# EAGLE board Western Aero 2020 (EAGLE 9.4.2)
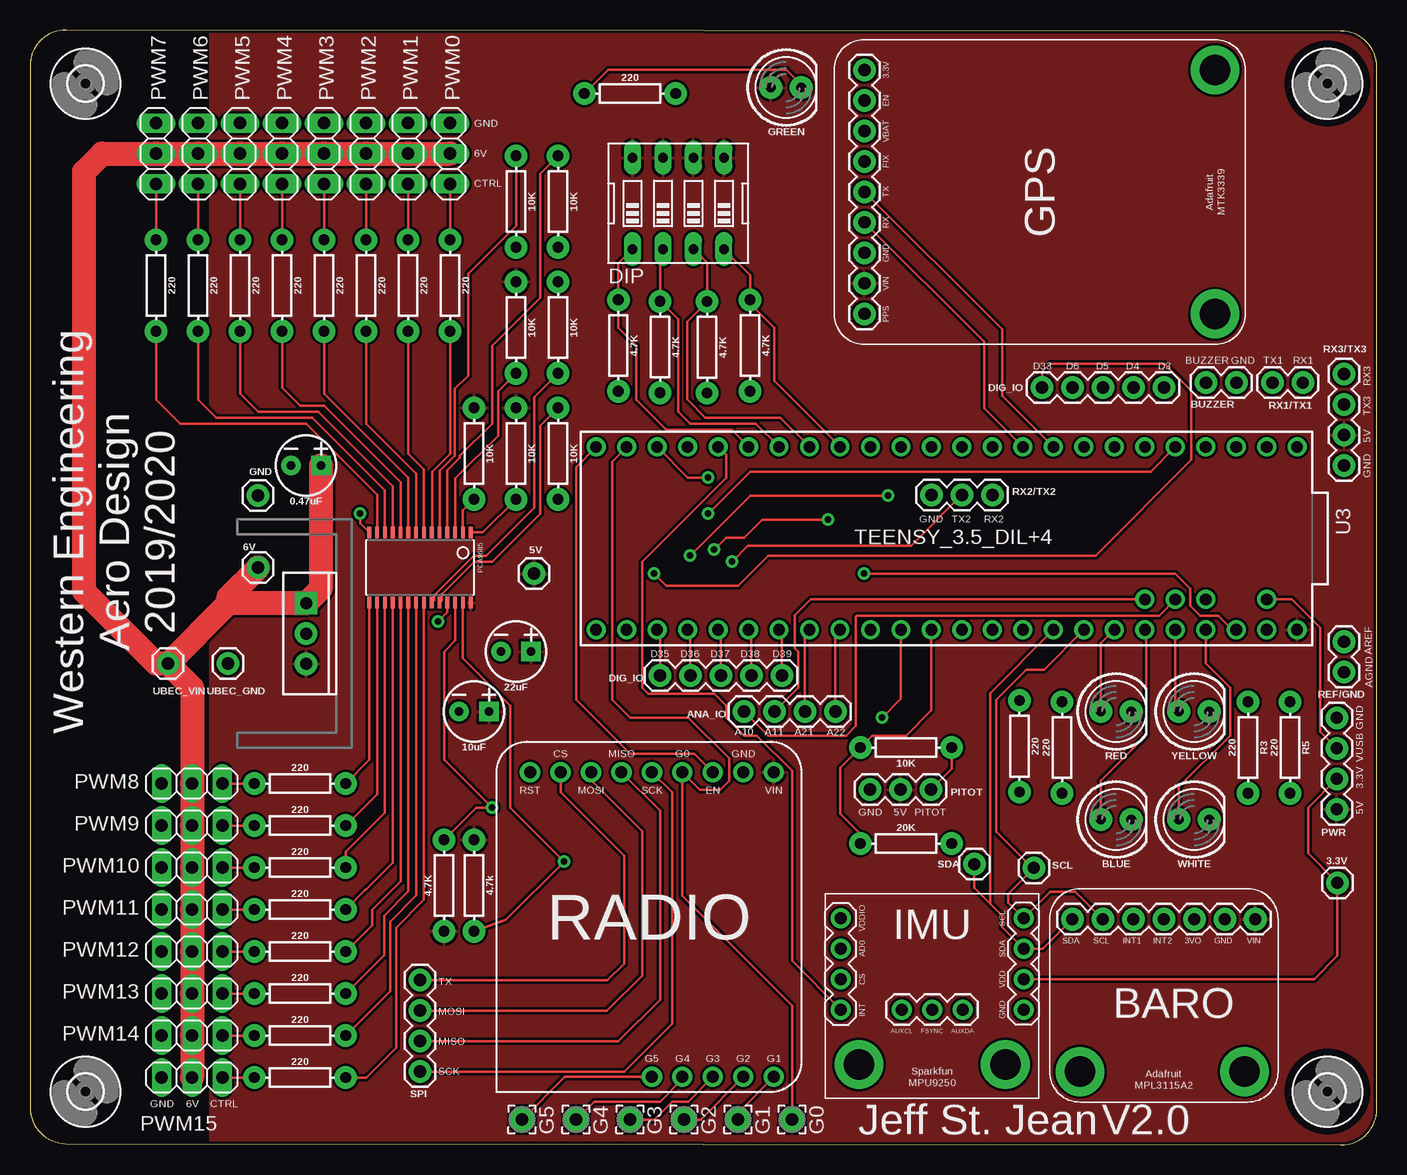
[diagram p0: board, top side]
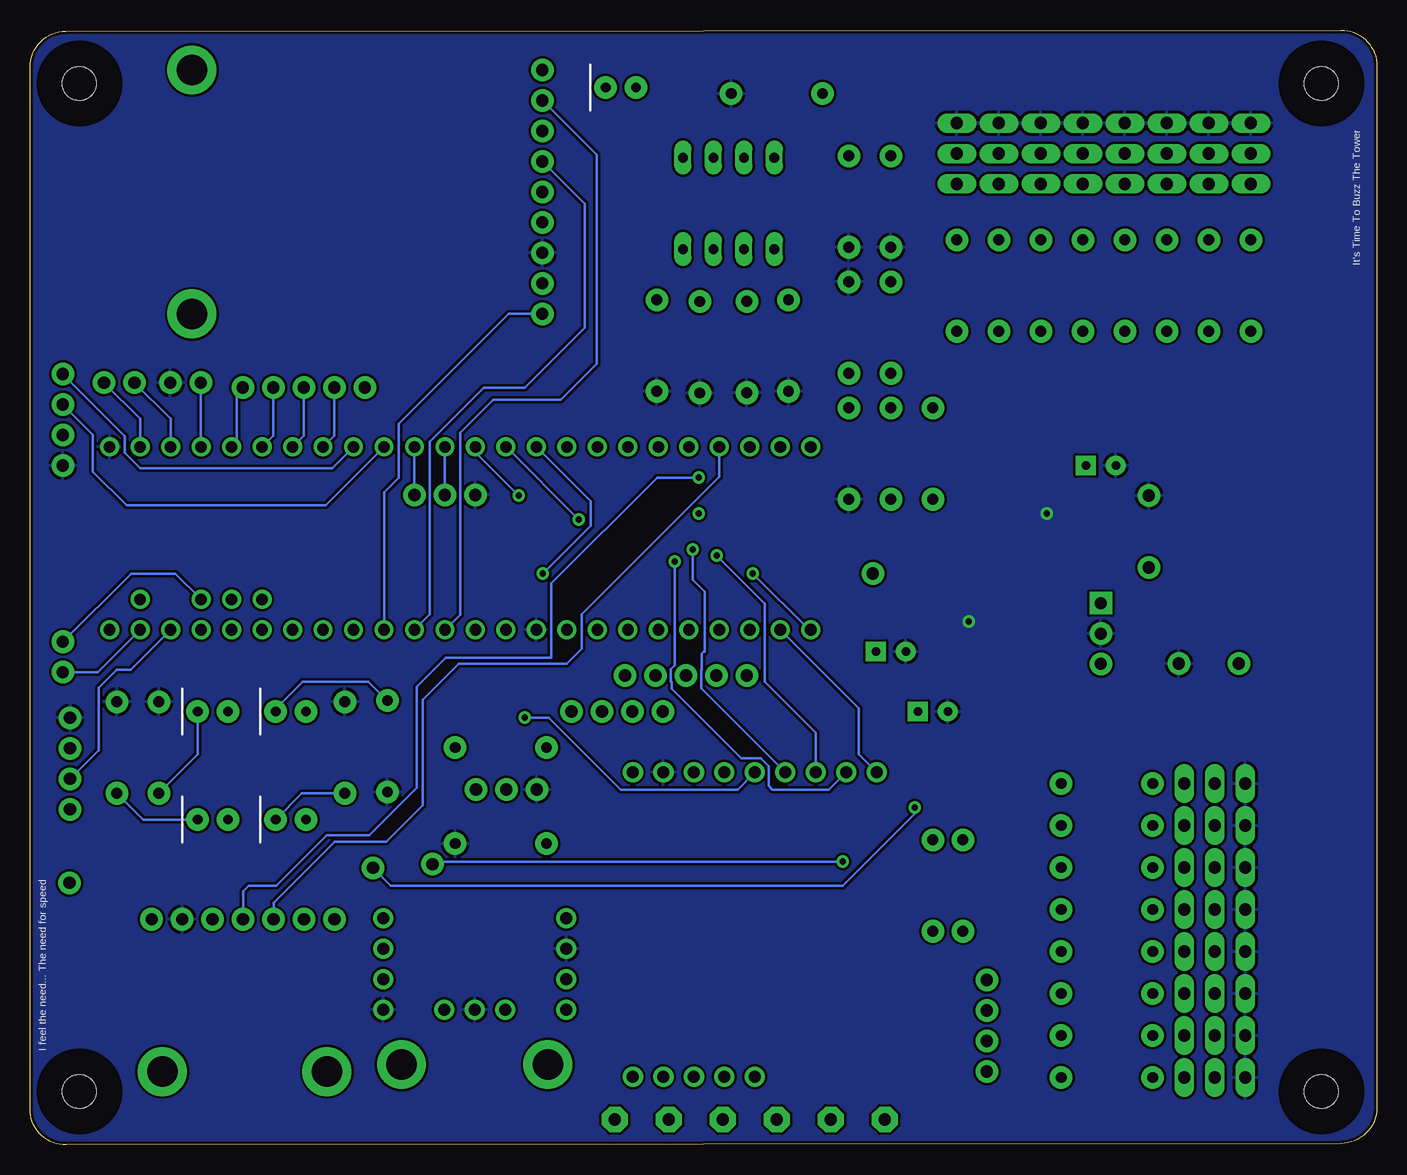
[diagram p1: board, bottom side, seen from below]

Size 112.24 x 92.91 mm. Coordinates in mm from the lower left corner, seen from the top.
Outline: 0,89.91 0,3.12 arc90 3,0.12 109.24,0 arc90 112.24,3 112.24,89.82 arc90 109.24,92.82 3,92.91 arc90 0,89.91
Copper layers (1*16): Top 0.035mm / dielectric 1.5mm / Bottom 0.035mm
Design rules "SparkFun": minimum track width 8mil, minimum drill 20mil, track to track 8mil, track to pad 8mil, pad to pad 8mil, via to via 8mil, smd to smd 8mil, copper to edge 10mil, drill to drill 8mil, minimum pad ring 12mil, minimum via ring 10mil, stop-mask expansion 4mil, vias tented up to drill 25mil, thermal gap 10mil

## Footprints (pad centres in the part's own frame; a part is rotated, then mirrored left to right if it is on the bottom)
1X01 = drill 1.016 pad 1.88: 1 0,0
CPOL-RADIAL-2.5MM-5MM = drill 0.7 pad 1.651 square: 1 1.25,0 | drill 0.7 pad 1.651: 2 -1.25,0
LED_5MM = drill 0.813 pad 1.88: A -1.27,0; K 1.27,0
EDG-04 = drill 0.813 long: 1 -3.81,-3.81; 2 -1.27,-3.81; 3 1.27,-3.81; 4 3.81,-3.81; 5 3.81,3.81; 6 1.27,3.81; 7 -1.27,3.81; 8 -3.81,3.81
2,15/1,0 = drill 1.016 pad 2.159 octagon: 1 0,0
2,8 = hole 2.8: 0,0
1X03 = drill 1.016 pad 1.88: 1 0,0; 2 2.54,0; 3 5.08,0
1X02 = drill 1.016 pad 1.88: 1 0,0; 2 2.54,0
1X04 = drill 1.016 pad 1.88: 1 0,0; 2 2.54,0; 3 5.08,0; 4 7.62,0
1X05 = drill 1.016 pad 1.88: 1 0,0; 2 2.54,0; 3 5.08,0; 4 7.62,0; 5 10.16,0
1X03' = drill 1.016 long: 1 -2.54,0; 2 0,0; 3 2.54,0
TSSOP28 = smd 0.305 x 0.991: 1 -4.225,-2.918; 2 -3.575,-2.918; 3 -2.925,-2.918; 4 -2.275,-2.918; 5 -1.625,-2.918; 6 -0.975,-2.918; 7 -0.325,-2.918; 8 0.325,-2.918; 9 0.975,-2.918; 10 1.625,-2.918; 11 2.275,-2.918; 12 2.925,-2.918; 13 3.575,-2.918; 14 4.225,-2.918; 15 4.225,2.918; 16 3.575,2.918; 17 2.925,2.918; 18 2.275,2.918; 19 1.625,2.918; 20 0.975,2.918; 21 0.325,2.918; 22 -0.325,2.918; 23 -0.975,2.918; 24 -1.625,2.918; 25 -2.275,2.918; 26 -2.925,2.918; 27 -3.575,2.918; 28 -4.225,2.918
AXIAL-0.3 = drill 0.9 pad 1.88: P$1 -3.81,0; P$2 3.81,0
TO220-IGO = drill 1 pad 1.88: GND 0,0; OUT 2.54,0 | drill 1 pad 1.88 square: IN -2.54,0
TEENSY_3.5_DIL+4 = drill 0.965: 0 -7.62,26.67; 1 -7.62,24.13; 2 -7.62,21.59; 3 -7.62,19.05; 3.3V 7.62,24.13; 3.3V3 -7.62,-6.35; 4 -7.62,16.51; 5 -7.62,13.97; 6 -7.62,11.43; 7 -7.62,8.89; 8 -7.62,6.35; 9 -7.62,3.81; 10 -7.62,1.27; 11 -7.62,-1.27; 12 -7.62,-3.81; 13 7.62,-3.81; 14/A0 7.62,-1.27; 15/A1 7.62,1.27; 16/A2 7.62,3.81; 17/A3 7.62,6.35; 18/A4 7.62,8.89; 19/A5 7.62,11.43; 20/A6 7.62,13.97; 21/A7 7.62,16.51; 22/A8 7.62,19.05; 23/A9 7.62,21.59; 24 -7.62,-8.89; 25 -7.62,-11.43; 26 -7.62,-13.97; 27 -7.62,-16.51; 28 -7.62,-19.05; 29 -7.62,-21.59; 30 -7.62,-24.13; 31/A12 -7.62,-26.67; 32/A13 -7.62,-29.21; 33/A14 7.62,-29.21; 34/A15 7.62,-26.67; 35/A16 7.62,-24.13; 36/A17 7.62,-21.59; 37/A18 7.62,-19.05; 38/A19 7.62,-16.51; 39/A20 7.62,-13.97; A10 5.08,19.05; A11 5.08,16.51; A21 7.62,-11.43; A22 7.62,-8.89; AGND 7.62,26.67; AREF 5.08,21.59; GND -7.62,29.21; GND1 7.62,-6.35; VIN 7.62,29.21; VUSB 5.08,26.67
SPARKFUN_MPU9250_IMU = drill 1.001 pad 1.676: AD0 4.572,1.27; AUXCL 9.652,6.35; AUXDA 9.652,11.43; CS 7.112,1.27; FSYNC 9.652,8.89; GND 9.652,16.51; SCL 2.032,16.51; SDA 4.572,16.51; VDD 7.112,16.51; VDDIO 2.032,1.27 | drill 1 pad 1.676: INT 9.652,1.27 | drill 2.54 pad 4.064: P$1 14.224,2.794; P$2 14.224,14.986
ADAFRUIT_MPL3115A2_BAROMETER = drill 1.016 pad 1.88: 3VO 6.985,2.54; GND 4.445,2.54; INT1 12.065,2.54; INT2 9.525,2.54; SCL 14.605,2.54; SDA 17.145,2.54; VIN 1.905,2.54 | drill 2.54 pad 4.064: P$1 16.51,15.24; P$2 2.794,15.24
ADAFRUIT_RFM95W_LORA_RADIO = drill 1 pad 1.676: 1 2.29,-26.67; 2 4.83,-26.67; 3 7.37,-26.67; 4 9.91,-26.67; 5 12.45,-26.67; 6 14.99,-26.67; 7 17.53,-26.67; 8 20.07,-26.67; 9 22.61,-26.67; 10 2.29,-1.27; 11 4.83,-1.27; 12 7.37,-1.27; 13 9.91,-1.27; 14 12.45,-1.27
ADAFRUIT_MTK3339_GPS = drill 1.016 pad 1.88: 3.3V 2.54,2.54; EN 5.08,2.54; FIX 10.16,2.54; GND 17.78,2.54; PPS 22.86,2.54; RX 15.24,2.54; TX 12.7,2.54; VBAT 7.62,2.54; VIN 20.32,2.54 | drill 2.54 pad 4.064: P$1 22.86,31.75; P$2 2.54,31.75

## Placement (x,y rotation side)
3.3V  [1X01]  108.95,21.85 0 top
5V  [1X01]  42,47.62 0 top
6V  [1X01]  19,48.12 0 top
C1  0.47uF  [CPOL-RADIAL-2.5MM-5MM]  23,56.62 0 top
C2  22uF  [CPOL-RADIAL-2.5MM-5MM]  40.5,41.12 0 top
C4  10uF  [CPOL-RADIAL-2.5MM-5MM]  37,36.12 0 top
D1  BLUE  [LED_5MM]  90.5,27.12 0 top
D2  YELLOW  [LED_5MM]  97,36.12 0 top
D3  WHITE  [LED_5MM]  97,27.12 0 top
D4  GREEN  [LED_5MM]  63,88.12 0 top
D6  RED  [LED_5MM]  90.5,36.12 0 top
DIP  [EDG-04]  54.02,78.46 0 top
G0  WIREPAD  [2,15/1,0]  63.5,2.12 270 top
G1  WIREPAD  [2,15/1,0]  59,2.12 270 top
G2  WIREPAD  [2,15/1,0]  54.5,2.12 270 top
G3  WIREPAD  [2,15/1,0]  50,2.12 270 top
G4  WIREPAD  [2,15/1,0]  45.5,2.12 270 top
G5  WIREPAD  [2,15/1,0]  41,2.12 270 top
GND  [1X01]  19,54.12 0 top
H1  MOUNT-HOLE2.8  [2,8]  4.63,88.45 0 top
H2  MOUNT-HOLE2.8  [2,8]  108.13,88.45 0 top
H3  MOUNT-HOLE2.8  [2,8]  108.13,4.45 0 top
H4  MOUNT-HOLE2.8  [2,8]  4.63,4.45 0 top
J1  PITOT  [1X03]  70,29.62 0 top
J2  BUZZER  [1X02]  98,63.52 0 top
J3  RX2/TX2  [1X03]  75.12,54.17 0 top
J4  RX3/TX3  [1X04]  109.5,56.62 90 top
J5  SPI  [1X04]  32.5,6.12 90 top
J6  DIG_IO  [1X05]  52.5,39.12 0 top
J7  RX1/TX1  [1X02]  106.08,63.52 180 top
J8  DIG_IO  [1X05]  94.5,63.12 180 top
J9  REF/GND  [1X02]  109.5,39.4 90 top
J10  ANA_IO  [1X04]  59.5,36.12 0 top
J11  PWR  [1X04]  108.9,27.97 90 top
JP1  PWM0  [1X03']  35,82.62 90 top
JP2  PWM1  [1X03']  31.5,82.62 90 top
JP3  PWM2  [1X03']  28,82.62 90 top
JP4  PWM3  [1X03']  24.5,82.62 90 top
JP5  PWM4  [1X03']  21,82.62 90 top
JP6  PWM5  [1X03']  17.5,82.62 90 top
JP7  PWM6  [1X03']  14,82.62 90 top
JP8  PWM7  [1X03']  10.5,82.62 90 top
JP9  PWM8  [1X03']  13.5,30.12 180 top
JP10  PWM9  [1X03']  13.5,26.62 180 top
JP11  PWM10  [1X03']  13.5,23.12 180 top
JP12  PWM11  [1X03']  13.5,19.62 180 top
JP13  PWM12  [1X03']  13.5,16.12 180 top
JP14  PWM13  [1X03']  13.5,12.62 180 top
JP15  PWM14  [1X03']  13.5,9.12 180 top
JP16  PWM15  [1X03']  13.5,5.62 180 top
PCA9685  [TSSOP28]  32.5,48.12 180 top
R1  220  [AXIAL-0.3]  82.45,33.22 90 top
R2  220  [AXIAL-0.3]  86,33.12 270 top
R3  220  [AXIAL-0.3]  101.5,33.12 270 top
R4  220  [AXIAL-0.3]  50,87.62 180 top
R5  220  [AXIAL-0.3]  105,33.12 270 top
R6  4.7K  [AXIAL-0.3]  60,66.62 90 top
R7  4.7K  [AXIAL-0.3]  56.42,66.47 90 top
R8  4.7K  [AXIAL-0.3]  52.5,66.5 90 top
R9  4.7K  [AXIAL-0.3]  49.02,66.62 90 top
R10  220  [AXIAL-0.3]  35,71.62 90 top
R11  220  [AXIAL-0.3]  31.5,71.62 90 top
R12  220  [AXIAL-0.3]  28,71.62 90 top
R13  220  [AXIAL-0.3]  24.5,71.62 90 top
R14  220  [AXIAL-0.3]  21,71.62 90 top
R15  220  [AXIAL-0.3]  17.5,71.62 90 top
R16  220  [AXIAL-0.3]  14,71.62 90 top
R17  220  [AXIAL-0.3]  10.5,71.62 90 top
R18  220  [AXIAL-0.3]  22.5,30.12 180 top
R19  220  [AXIAL-0.3]  22.5,26.62 180 top
R20  220  [AXIAL-0.3]  22.5,23.12 180 top
R21  220  [AXIAL-0.3]  22.5,19.62 180 top
R22  220  [AXIAL-0.3]  22.5,16.12 180 top
R23  220  [AXIAL-0.3]  22.5,12.62 180 top
R24  220  [AXIAL-0.3]  22.5,9.12 180 top
R25  220  [AXIAL-0.3]  22.5,5.62 180 top
R26  20K  [AXIAL-0.3]  73,25.12 180 top
R27  10K  [AXIAL-0.3]  73,33.12 0 top
R28  10K  [AXIAL-0.3]  40.5,57.62 90 top
R29  10K  [AXIAL-0.3]  37,57.62 90 top
R30  4.7k  [AXIAL-0.3]  37,21.62 90 top
R31  4.7K  [AXIAL-0.3]  34.5,21.62 270 top
R32  10K  [AXIAL-0.3]  40.5,68.12 90 top
R33  10K  [AXIAL-0.3]  44,57.62 90 top
R34  10K  [AXIAL-0.3]  40.5,78.62 90 top
R35  10K  [AXIAL-0.3]  44,78.62 90 top
R36  10K  [AXIAL-0.3]  44,68.12 90 top
SCL  [1X01]  83.65,23.1 0 top
SDA  [1X01]  78.7,23.4 0 top
U1  [TO220-IGO]  23,42.62 270 top
U3  TEENSY_3.5_DIL+4  [TEENSY_3.5_DIL+4]  76.39,50.55 270 top
U5  SPARKFUN_MPU9250_IMU  [SPARKFUN_MPU9250_IMU]  66.29,20.93 270 top
U6  ADAFRUIT_MPL3115A2_BAROMETER  [ADAFRUIT_MPL3115A2_BAROMETER]  104.01,21.35 180 top
U8  ADAFRUIT_RFM95W_LORA_RADIO  [ADAFRUIT_RFM95W_LORA_RADIO]  64.28,4.4 180 top
U9  ADAFRUIT_MTK3339_GPS  [ADAFRUIT_MTK3339_GPS]  67,92.12 270 top
UBEC_GND  [1X01]  16.5,40.12 0 top
UBEC_VIN  [1X01]  11.5,40.12 0 top

## Library data of the parts
3.3V 5V 6V GND J1-J3 J6-J9 SCL SDA UBEC_GND UBEC_VIN = SparkFun-Connectors
C1 C2 C4 = SparkFun-Capacitors; PROD_ID: CAP-08440
D1-D4 D6 = SparkFun-LED
DIP = special
G0 G1-G5 = wirepad
H1-H4 = holes
J4 J5 J10 J11 = SparkFun-Connectors; PROD_ID: CONN-09696
JP1-JP16 = pinhead
PCA9685 = adafruit
R1-R36 = SparkFun-Resistors; PROD_ID: RES-8371
U1 = SparkFun-IC-Power
U3 = Teensy_3_and_LC_Series_Boards_v1.4
U5 U6 U8 U9 = AERO_Eagle_Library

## Nets
3.3V: 3.3V.1 J11.2 U3.3.3V U3.3.3V3 U5.VDD
5V: 5V.1 C2.1 C4.1 D4.A DIP.5 DIP.6 DIP.7 DIP.8 J1.2 J4.2 J11.1 PCA9685.28 R28.P$2 R29.P$2 R30.P$2 R31.P$2 R32.P$2 U1.OUT U3.VIN U6.VIN U8.1 U9.VIN
6V: 6V.1 C1.1 JP1.2 JP2.2 JP3.2 JP4.2 JP5.2 JP6.2 JP7.2 JP8.2 JP9.2 JP10.2 JP11.2 JP12.2 JP13.2 JP14.2 JP15.2 JP16.2 U1.IN UBEC_VIN.1
A10: J10.1 U3.A10
A11: J10.2 U3.A11
A21: J10.3 U3.A21
A22: J10.4 U3.A22
AGND: J9.1 U3.AGND
AREF: J9.2 U3.AREF
BLUE_LED: D1.A U3.21/A7
BUZZER: J2.1 U3.2
D3: J8.1 U3.3
D4: J8.2 U3.4
D5: J8.3 U3.5
D6: J8.4 U3.6
D33: J8.5 U3.33/A14
D35: J6.1 U3.35/A16
D36: J6.2 U3.36/A17
D37: J6.3 U3.37/A18
D38: J6.4 U3.38/A19
D39: J6.5 U3.39/A20
DIP1: DIP.4 R6.P$2 U3.24
DIP2: DIP.3 R7.P$2 U3.25
DIP3: DIP.2 R8.P$2 U3.26
DIP4: DIP.1 R9.P$2 U3.27
ENV_INT1: U3.29 U6.INT1
ENV_INT2: U3.30 U6.INT2
GND: C1.2 C2.2 C4.2 GND.1 J1.1 J2.2 J3.1 J4.1 J11.4 JP1.3 JP2.3 JP3.3 JP4.3 JP5.3 JP6.3 JP7.3 JP8.3 JP9.3 JP10.3 JP11.3 JP12.3 JP13.3 JP14.3 JP15.3 JP16.3 PCA9685.14 PCA9685.25 R1.P$1 R2.P$1 R3.P$1 R4.P$1 R5.P$1 R6.P$1 R7.P$1 R8.P$1 R9.P$1 R26.P$1 R33.P$1 R34.P$1 R35.P$1 R36.P$2 U1.GND U3.GND U3.GND1 U5.AD0 U5.FSYNC U5.GND U6.GND U8.2 U9.GND UBEC_GND.1
GPS_EN: U3.15/A1 U9.EN
GPS_FIX: U3.16/A2 U9.FIX
GPS_PPS: U3.17/A3 U9.PPS
IMU_INT: U3.28 U5.INT
LORA_EN: U3.32/A13 U8.3
LORA_INT: G0.1 U3.31/A12 U8.4
LORA_RST: U3.34/A15 U8.9
MISO: J5.2 U3.12 U8.6
MOSI: J5.3 U3.11 U8.7
N$1: JP1.1 R10.P$2
N$2: D6.K R1.P$2
N$3: D1.K R2.P$2
N$4: D2.K R3.P$2
N$5: D3.K R5.P$2
N$6: D4.K R4.P$2
N$7: G5.1 U8.14
N$8: G1.1 U8.10
N$9: JP2.1 R11.P$2
N$10: G2.1 U8.11
N$11: JP3.1 R12.P$2
N$12: JP4.1 R13.P$2
N$13: JP5.1 R14.P$2
N$14: JP6.1 R15.P$2
N$15: JP7.1 R16.P$2
N$16: JP8.1 R17.P$2
N$17: JP9.1 R18.P$2
N$18: JP10.1 R19.P$2
N$19: JP11.1 R20.P$2
N$20: JP12.1 R21.P$2
N$21: JP13.1 R22.P$2
N$22: JP14.1 R23.P$2
N$23: JP15.1 R24.P$2
N$24: JP16.1 R25.P$2
N$25: G4.1 U8.13
N$26: G3.1 U8.12
N$27: PCA9685.1 R28.P$1
N$28: J1.3 R27.P$2
N$29: PCA9685.24 R33.P$2
N$30: PCA9685.23 R36.P$1
N$31: PCA9685.5 R34.P$2
N$32: PCA9685.4 R35.P$2
N$33: PCA9685.3 R32.P$1
N$34: PCA9685.2 R29.P$1
PITOT: R26.P$2 R27.P$1 U3.14/A0
PWM0: PCA9685.6 R10.P$1
PWM1: PCA9685.7 R11.P$1
PWM2: PCA9685.8 R12.P$1
PWM3: PCA9685.9 R13.P$1
PWM4: PCA9685.10 R14.P$1
PWM5: PCA9685.11 R15.P$1
PWM6: PCA9685.12 R16.P$1
PWM7: PCA9685.13 R17.P$1
PWM8: PCA9685.15 R18.P$1
PWM9: PCA9685.16 R19.P$1
PWM10: PCA9685.17 R20.P$1
PWM11: PCA9685.18 R21.P$1
PWM12: PCA9685.19 R22.P$1
PWM13: PCA9685.20 R23.P$1
PWM14: PCA9685.21 R24.P$1
PWM15: PCA9685.22 R25.P$1
RED_LED: D6.A U3.20/A6
RX1: J7.1 U3.0
RX2: J3.3 U3.9
RX3: J4.4 U3.7 U9.TX
SCK: J5.1 U3.13 U8.5
SCL: PCA9685.26 R31.P$1 SCL.1 U3.19/A5 U5.SCL U6.SCL
SDA: PCA9685.27 R30.P$1 SDA.1 U3.18/A4 U5.SDA U6.SDA
TX1: J7.2 U3.1
TX2: J3.2 J5.4 U3.10 U8.8
TX3: J4.3 U3.8 U9.RX
VUSB: J11.3 U3.VUSB
WHITE_LED: D3.A U3.23/A9
YELLOW_LED: D2.A U3.22/A8

## Tracks (layer width: path | path; a pad name or v marks a point on that pad's centre or on a via)
3.3V  (via drill 0.51)
  Top 0.203: U5.VDD 107,13.82 108.95,15.77 3.3V.1 106.5,24.3 106.5,28.11 J11.2 | U3.3.3V 100.19,42.93 99,44.12 97.5,44.12 96.7,44.92 96.7,46.37 95.45,47.62 v69.5,47.62
  Bottom 0.203: U3.3.3V3 65.5,53.63 65.5,51.62 v69.5,47.62 | U3.3.3V 103.83,39.62 105,39.62 106.5,38.12 106.5,32.91 J11.2
5V
  pour Top: 15,-0.38 15,93.12 112.5,93.12 112.5,-0.38
6V
  Top 2: JP1.2 JP2.2 JP3.2 JP4.2 JP5.2 JP6.2 JP7.2 JP8.2 6,82.62 4.5,81.12 4.5,46.12 10.5,40.12 UBEC_VIN.1 | UBEC_VIN.1 16.54,45.16 | 16.54,45.16 U1.IN 24.25,46.41 C1.1 | 16.54,45.16 16.54,45.66 6V.1 | UBEC_VIN.1 13.5,38.12 JP9.2 JP10.2 JP11.2 JP12.2 JP13.2 JP14.2 JP15.2 JP16.2
A10
  Top 0.203: U3.A10 94.09,44.12 68.9,44.12 68.8,44.02 68.8,34.92 68,34.12 61.5,34.12 J10.1
A11
  Top 0.203: J10.2 64,38.08 64,41.12 63.72,41.4 63.72,44.15 65.05,45.47 U3.A11
A21
  Top 0.203: J10.3 64.58,42.55 U3.A21
A22
  Top 0.203: J10.4 67.12,42.55 U3.A22
AGND
  Bottom 0.203: U3.AGND 106.59,39.4 J9.1
AREF
  Bottom 0.203: J9.2 103.81,47.62 100.13,47.62 U3.AREF
BLUE_LED
  Top 0.203: D1.A 89.23,30.35 93.02,34.14 93.02,42.82 U3.21/A7
BUZZER
  Bottom 0.203: J2.1 98,58.19 U3.2
D3  (via drill 0.51)
  Top 0.203: v56.5,52.62 60,56.12 93.39,56.12 U3.3
  Bottom 0.203: U3.3 95,58.61 95,62.62 J8.1
D4
  Bottom 0.203: U3.4 91.96,59.11 J8.2
D5
  Bottom 0.203: U3.5 89.42,59.11 J8.3
D6
  Bottom 0.203: U3.6 86.88,59.11 J8.4
D33  (via drill 0.51)
  Top 0.203: J8.5 84.34,64.46 85,65.12 94.5,65.12 96.78,62.85 96.78,57.1 88.8,49.12 61.5,49.12 59,46.62 53,46.62 v52,47.62
  Bottom 0.203: v52,47.62 47.31,42.93 U3.33/A14
D35
  Top 0.203: J6.1 52.5,42.69 U3.35/A16
D36
  Top 0.203: J6.2 55.04,42.69 U3.36/A17
D37
  Top 0.203: J6.3 57.58,42.69 U3.37/A18
D38
  Top 0.203: J6.4 60.12,42.69 U3.38/A19
D39
  Top 0.203: J6.5 62.66,42.69 U3.39/A20
DIP1
  Top 0.203: DIP.4 60,72.48 R6.P$2 60,70.12 62,68.12 62,63.67 U3.24
DIP2
  Top 0.203: DIP.3 56.42,73.52 R7.P$2 54.75,68.61 54.75,62.15 56.27,60.62 62.51,60.62 U3.25
DIP3
  Top 0.203: DIP.2 52.5,74.4 R8.P$2 54,68.81 54,61.12 55,60.12 60.47,60.12 U3.26
DIP4
  Top 0.203: DIP.1 49.02,73.47 R9.P$2 49.02,68.1 50.5,66.62 50.5,62.12 53.03,59.59 58.47,59.59 U3.27
ENV_INT1
  Bottom 0.203: U3.29 54.8,55.67 66.25,44.22 66.25,41.37 67.5,40.12 76.5,40.12 79.5,37.12 79.5,28.32 82.55,25.27 86.85,25.27 91.94,20.18 U6.INT1
ENV_INT2  (via drill 0.51)
  Top 0.203: v56.5,55.62 54.81,55.62 U3.30
  Bottom 0.203: v56.5,55.62 59.98,55.62 68.8,46.8 68.8,40.62 77.58,40.62 80,38.2 80,29.77 83.95,25.82 87.5,25.82 91.7,21.62 94,21.62 94.48,21.14 U6.INT2
GND  (via drill 0.51)
  Top 0.203: PCA9685.25 34.77,44.4 v34,43.62 | PCA9685.14 27.5,51.81 v27.5,52.62
  pour Bottom: -1,-0.38 -1,92.62 -0.5,93.12 112.5,93.12 112.5,-0.38
GPS_EN
  Bottom 0.203: U3.15/A1 76.4,44.19 76.4,59.37 73.65,62.12 68,62.12 65,65.12 65,82.5 U9.EN
GPS_FIX
  Bottom 0.203: U3.16/A2 78.92,44.21 78.92,58.62 74.42,63.12 71,63.12 66,68.12 66,78.42 U9.FIX
GPS_PPS
  Bottom 0.203: U3.17/A3 82.74,54.38 81.5,55.62 81.5,60.12 72.36,69.26 U9.PPS
IMU_INT
  Top 0.203: U5.INT 63.5,15.34 63.5,31.18 60.56,34.12 59.5,34.12 58,35.62 58,36.62 57,37.62 51.5,37.62 51,38.12 51,48.62 58,55.62 58,57.51 U3.28
LORA_EN
  Top 0.203: U8.3 55.36,32.62 50,32.62 45.5,37.12 45.5,56.49 U3.32/A13
LORA_INT
  Top 0.203: G0.1 63.5,11.62 54.37,20.75 U8.4 55.82,29.62 57.5,29.62 58.25,30.37 58.25,32.22 54.85,35.62 50,35.62 48.5,37.12 48.5,56.95 U3.31/A12
LORA_RST
  Bottom 0.203: U8.9 43.17,32.57 43.17,36.38 U3.34/A15
MISO  (via drill 0.51)
  Top 0.203: v57,49.62 58,50.62 59.5,50.62 61,52.12 v66.5,52.12 | J5.2 49.04,8.66 52.5,12.12 52.5,27.86 U8.6
  Bottom 0.203: U8.6 56.28,38.07 56.28,39.64 56.27,39.65 56.27,40.92 56.08,41.12 56,41.12 56,46.12 57,47.12 v57,49.62 | v66.5,52.12 72.55,58.17 U3.12
MOSI  (via drill 0.51)
  Top 0.203: U8.7 46.42,30.74 51,26.16 51,14.12 48.08,11.2 J5.3 | v55,49.12 60,54.12 v71.5,54.12
  Bottom 0.203: U8.7 46.75,34.37 51,38.62 51,45.12 v55,49.12 | v71.5,54.12 75.12,57.74 U3.11
N$1
  Top 0.203: R10.P$2 JP1.1
N$2
  Bottom 0.203: R1.P$2 84.04,38.62 89.5,38.62 91.77,36.35 D6.K
N$3
  Bottom 0.203: R2.P$2 89.58,29.31 D1.K
N$4
  Bottom 0.203: D2.K 98.27,32.54 R3.P$2
N$5
  Bottom 0.203: D3.K 102.81,27.12 R5.P$2
N$6
  Top 0.203: R4.P$2 48.19,89.62 63,89.62 64.27,88.35 D4.K
N$7
  Top 0.203: G5.1 44.55,5.67 U8.14
N$8
  Top 0.203: G1.1 59,2.68 U8.10
N$9
  Top 0.203: R11.P$2 JP2.1
N$10
  Top 0.203: G2.1 55.9,2.12 U8.11
N$11
  Top 0.203: R12.P$2 JP3.1
N$12
  Top 0.203: R13.P$2 JP4.1
N$13
  Top 0.203: R14.P$2 JP5.1
N$14
  Top 0.203: R15.P$2 JP6.1
N$15
  Top 0.203: R16.P$2 JP7.1
N$16
  Top 0.203: R17.P$2 JP8.1
N$17
  Top 0.203: R18.P$2 JP9.1
N$18
  Top 0.203: R19.P$2 JP10.1
N$19
  Top 0.203: R20.P$2 JP11.1
N$20
  Top 0.203: R21.P$2 JP12.1
N$21
  Top 0.203: R22.P$2 JP13.1
N$22
  Top 0.203: R23.P$2 JP14.1
N$23
  Top 0.203: R24.P$2 JP15.1
N$24
  Top 0.203: R25.P$2 JP16.1
N$25
  Top 0.203: G4.1 47,3.62 52.5,3.62 54.37,5.49 U8.13
N$26
  Top 0.203: G3.1 52,2.12 53.5,3.62 54.86,3.62 U8.12
N$27
  Top 0.203: PCA9685.1 37.73,51.04 R28.P$1
N$28
  Top 0.203: R27.P$2 76.81,31.35 J1.3
N$29
  Top 0.203: PCA9685.24 34.32,45.4 34.32,45.9 37.04,48.62 38.5,48.62 42.5,52.62 42.5,59.93 R33.P$2
N$30
  Top 0.203: R36.P$1 42,62.31 42,53.12 38,49.12 36.96,49.12 33.67,45.83 33.67,45.4 PCA9685.23
N$31
  Top 0.203: R34.P$2 40.5,76.62 36.5,72.62 36.5,64.12 35.41,63.03 35.41,57.45 34.12,56.17 PCA9685.5
N$32
  Top 0.203: PCA9685.4 34.77,56.25 35.81,57.28 35.81,57.43 38.5,60.12 38.5,66.62 42.5,70.62 42.5,80.93 R35.P$2
N$33
  Top 0.203: PCA9685.3 35.42,55.55 39,59.12 39,62.81 R32.P$1
N$34
  Top 0.203: PCA9685.2 36.08,52.89 R29.P$1
PITOT
  Top 0.203: U3.14/A0 75.12,36.24 73,34.12 70.19,34.12 R27.P$1 67.5,31.43 67.5,27.62 69.19,25.93 R26.P$2
PWM0
  Top 0.203: PCA9685.6 33.5,51.06 33.5,56.12 35,57.62 R10.P$1
PWM1
  Top 0.203: PCA9685.7 32.83,56.3 31.5,57.62 R11.P$1
PWM2
  Top 0.203: PCA9685.8 32.17,55.95 28,60.12 R12.P$1
PWM3
  Top 0.203: PCA9685.9 31.5,51.06 31.5,55.62 24.5,62.62 R13.P$1
PWM4
  Top 0.203: PCA9685.10 30.88,55.25 24.5,61.62 22.5,61.62 21,63.12 R14.P$1
PWM5
  Top 0.203: PCA9685.11 30.23,54.9 24,61.12 19,61.12 17.5,62.62 R15.P$1
PWM6
  Top 0.203: PCA9685.12 29.57,54.55 23.5,60.62 15.5,60.62 14,62.12 R16.P$1
PWM7
  Top 0.203: PCA9685.13 28.93,54.2 23,60.12 12.5,60.12 10.5,62.12 R17.P$1
PWM8
  Top 0.203: PCA9685.15 28.27,32.09 R18.P$1
PWM9
  Top 0.203: PCA9685.16 28.93,29.24 R19.P$1
PWM10
  Top 0.203: R20.P$1 26.31,24.43 29.57,27.7 PCA9685.17
PWM11
  Top 0.203: R21.P$1 27.91,21.22 28,21.31 30.23,23.54 PCA9685.18
PWM12
  Top 0.203: R22.P$1 28.5,18.31 28.5,19.62 30.88,22 PCA9685.19
PWM13
  Top 0.203: PCA9685.20 31.52,21.15 29.5,19.12 29.5,15.81 R23.P$1
PWM14
  Top 0.203: PCA9685.21 32.17,20.8 30,18.62 30,12.81 R24.P$1
PWM15
  Top 0.203: R25.P$1 28,5.62 30.5,8.12 30.5,18.12 32.83,20.45 PCA9685.22
RED_LED
  Top 0.203: D6.A 89.23,41.8 U3.20/A6
RX1
  Bottom 0.203: J7.1 103.06,60.51 U3.0
RX2
  Bottom 0.203: J3.3 U3.9
RX3
  Top 0.203: U3.7 81,62.45 81,67.96 U9.TX
  Bottom 0.203: J4.4 104.33,59.07 104.33,57.67 103.05,56.4 87.06,56.4 U3.7
SCK  (via drill 0.51)
  Top 0.203: v71,35.62 72.58,37.2 U3.13 | J5.1 49.5,6.12 53.5,10.12 53.5,29.4 U8.5
  Bottom 0.203: U8.5 53.28,29.62 63,29.62 69,35.62 v71,35.62
SCL  (via drill 0.51)
  Top 0.203: U6.SCL 87.09,21.12 85.02,21.12 U5.SCL 81.5,20.2 81.5,20.95 83.59,23.03 | U3.19/A5 84.51,39.62 83,39.62 80.5,37.12 80.5,26.12 83.59,23.03 | SCL.1 83.59,23.03 | PCA9685.26 35.42,42.05 34.5,41.12 34.5,32.12 v38.5,28.12 37.19,28.12 R31.P$1
  Bottom 0.203: SCL.1 82.17,21.62 44.5,21.62 38.5,27.62 v38.5,28.12
SDA  (via drill 0.51)
  Top 0.203: U6.SDA 84.41,16.36 U5.SDA 81,18.16 81,19.12 80,20.12 | U3.18/A4 80,37.65 80,20.12 | SDA.1 78.7,21.42 80,20.12 | R30.P$1 39.65,18.77 v44.5,23.62 40,28.12 40,36.62 36.08,40.55 PCA9685.27
  Bottom 0.203: v44.5,23.62 78.47,23.62 SDA.1
TX1
  Bottom 0.203: J7.2 100.52,60.51 U3.1
TX2  (via drill 0.51)
  Top 0.203: J3.2 73.44,49.95 59.83,49.95 v58.5,48.62 | J5.4 48.12,13.74 49.5,15.12 49.5,24.12 44.21,29.41 U8.8
  Bottom 0.203: J3.2 U3.10 | U8.8 45.66,29.62 50.38,29.62 50.69,29.93 50.69,31.54 51.36,32.21 52.97,32.21 58.77,38.02 58.77,38.56 58.83,38.61 58.83,39.64 58.5,39.96 v58.5,48.62
TX3
  Top 0.203: U3.8 79.5,61.41 79.5,66.92 U9.RX
  Bottom 0.203: U3.8 87.61,53.3 104.17,53.3 107,56.12 107,59.2 J4.3
VUSB
  Top 0.203: U3.VUSB 105.15,45.47 107.5,43.12 107.5,34.45 J11.3
WHITE_LED
  Top 0.203: D3.A 95.73,29.85 100,34.12 100,38.12 97.98,40.14 U3.23/A9
YELLOW_LED
  Top 0.203: D2.A 95.44,36.41 U3.22/A8

## Text on the board
tPlace: Western Engineering / Aero Design / 2019/2020 | Jeff St. Jean | V2.0
tNames: GND | 6V | CTRL | D33 | D6 | D5 | D4 | D3 | BUZZER | GND | TX1 | RX1 | RX3 | TX3 | 5V | GND | GND | TX2 | RX2 | AREF | D35 | D36 | D37 | D38 | D39 | AGND | GND | A10 | A11 | A21 | A22 | VUSB | 3.3V | GND | 5V | PITOT | 5V | TX | MOSI | MISO | SCK | GND | 6V | CTRL
bNames: It's Time To Buzz The Tower | I feel the need... The need for speed